# Altium PCB snr-0007.PcbDoc
Units mm, origin at the board's own origin, x right, y up, seen from the top; angles counter-clockwise.
Board outline 150 x 51.5 mm, 2 copper layers (Top Layer, Bottom Layer), stack 1.571 mm thick; 10 components, 0 nets, 10 pads, 0 vias.
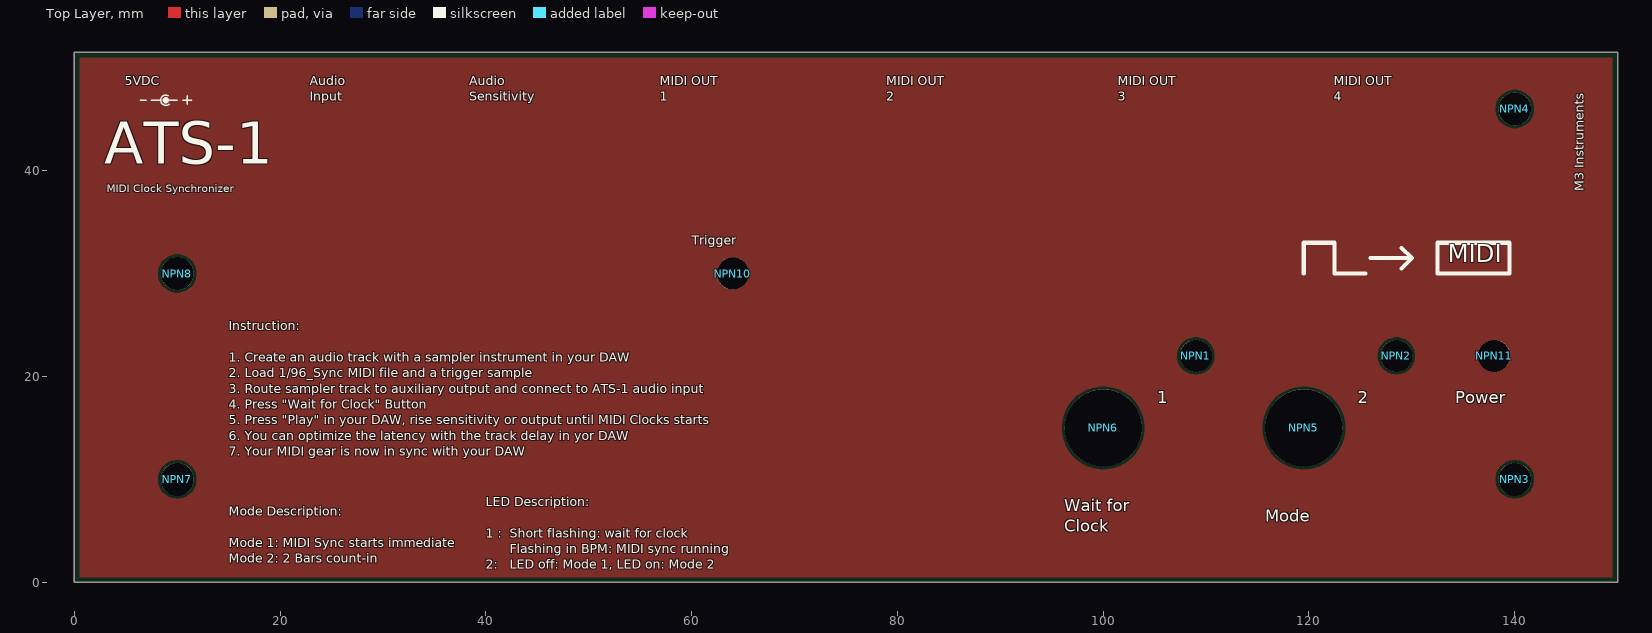
[diagram p0: Top Layer view]
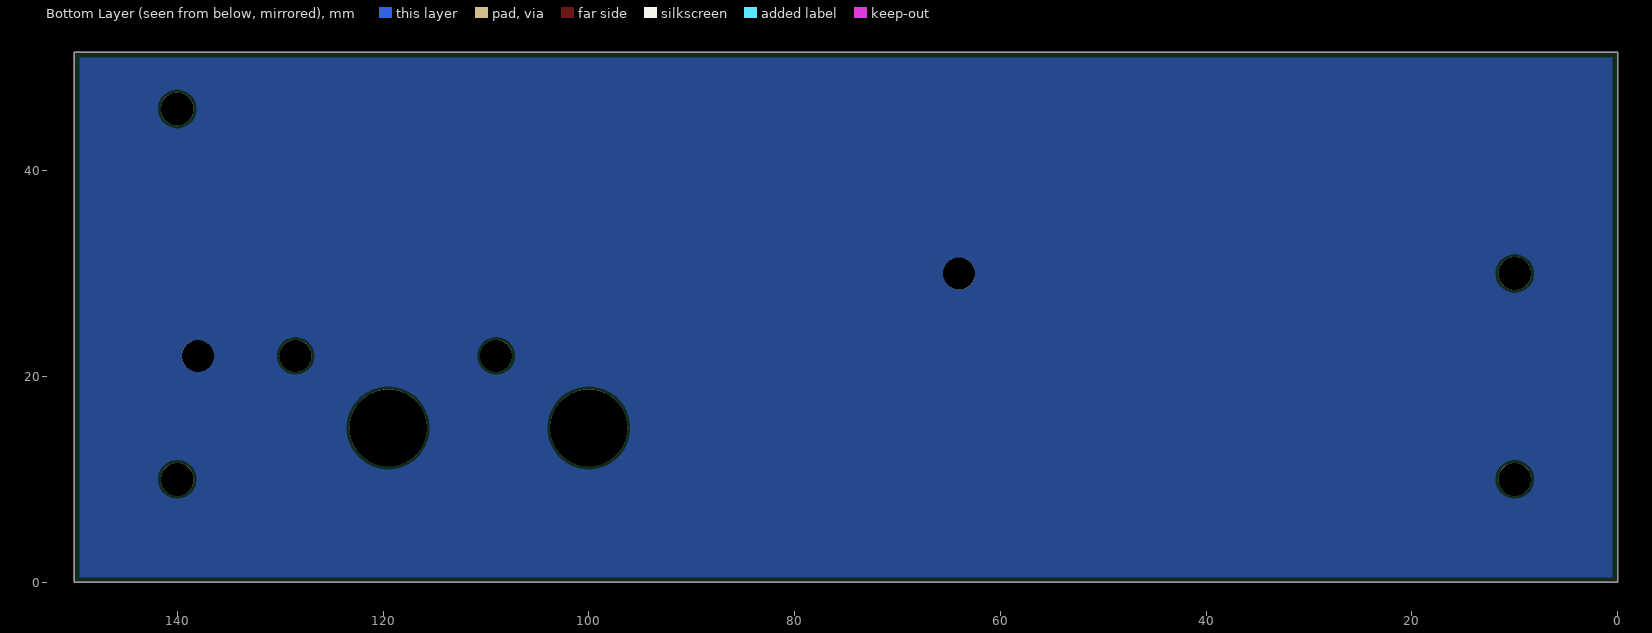
[diagram p1: Bottom Layer view, seen from below]

## Layer stack, top to bottom
Top Solder: solder mask 0.0102, Solder Resist, Dk 3.5
Top Layer: signal copper 0.0356
Dielectric 1: dielectric 1.5, FR-4, Dk 4.8
Bottom Layer: signal copper 0.0356
Bottom Solder: solder mask 0.0102, Solder Resist, Dk 3.5

## Board outline
0,0 150,0 150,51.5 0,51.5

## Design rules (kind name [scope] priority, off if disabled: settings)
Clearance [All] p1: gap=0.254 ignorepadtopadclearanceinfootprint=FALSE except(0: Arc-Hole Track-Hole SMDPad-Hole THPad-Hole Via-Hole Fill-Hole Poly-Hole Region-Hole Text-Hole)
PolygonConnect [All] p1: connectstyle=Relief reliefconductorwidth=0.254 reliefentries=4 polygonreliefangle="90 Angle" airgapwidth=0.254
RoutingVias [All] p1: holewidth=0.711 width=1.27 viastyle="Through Hole" minholewidth=0.711 minwidth=1.27 maxholewidth=0.711 maxwidth=1.27
SolderMaskExpansion [All] p1: expansion=0.102 istentingtop=FALSE
Width [All] p1: maxlimit=0.254 minlimit=0.254 preferedwidth=0.254
30 further rules are at their usual default settings.

## Components (designator, comment, footprint, x,y, rotation, side; value= is the part's Value field where it differs from the comment)
NPN1 "NPN_3.1mm" HOLE_NPH_3.1_LED_3mm#1 109,22 r90 top
NPN2 "NPN_3.1mm" HOLE_NPH_3.1_LED_3mm#1 128.5,22 r90 top
NPN3 "NPN_3.2mm" HOLE_NPH_3.2_M3#1 134.5,7 r90 top
NPN4 "NPN_3.2mm" HOLE_NPH_3.2_M3#2 134.5,41.5 r90 top
NPN5 "NPN_7.5mm" HOLE_NPH_7.5_F01 119.5,15 r0 top
NPN6 "NPN_7.5mm" HOLE_NPH_7.5_F01 100,15 r0 top
NPN7 "NPN_3.2mm" HOLE_NPH_3.2_M3#3 7.5,7 r90 top
NPN8 "NPN_3.2mm" HOLE_NPH_3.2_M3#4 7.5,41.5 r90 top
NPN10 "NPN_3.1mm" HOLE_NPH_3.1_LED_3mm#2 160.5,4 r90 top
NPN11 "NPN_3.1mm" HOLE_NPH_3.1_LED_3mm#3 153,4 r90 top

## Footprints (in the part's own frame and the unit in brackets; to place one, negate y for a bottom-side part, rotate by r counter-clockwise, add the part's x,y. Pads: shape width x height; smd on the part's side, far side on the other; paste and mask are expansions set on the pad)
HOLE_NPH_3.1_LED_3mm#1 [mm]
  round 3.1 hole 3.1 unplated: 8(0,0)
HOLE_NPH_3.1_LED_3mm#2 [mm]
  round 3.1 hole 3.1 unplated: 8(26,96.5)
HOLE_NPH_3.1_LED_3mm#3 [mm]
  round 3.1 hole 3.1 unplated: 8(18,15)
HOLE_NPH_3.2_M3#1 [mm]
  round 3.2 hole 3.2 unplated: 8(3,-5.5)
HOLE_NPH_3.2_M3#2 [mm]
  round 3.2 hole 3.2 unplated: 8(4.5,-5.5)
HOLE_NPH_3.2_M3#3 [mm]
  round 3.2 hole 3.2 unplated: 8(3,-2.5)
HOLE_NPH_3.2_M3#4 [mm]
  round 3.2 hole 3.2 unplated: 8(-11.5,-2.5)
HOLE_NPH_7.5_F01 [mm]
  round 7.5 hole 7.5 unplated: 1(0,0)

## Part data
NPN1 NPN2 NPN10 NPN11: library part NPH_3.1mm_LED_3mm
NPN3 NPN4 NPN7 NPN8: library part NPH_3.2mm_M3
NPN5 NPN6: library part NPH_7.5mm_F01

## Nets (pads, with @x,y where several pads share a name; then routed paths per layer and width w, separated by ;. In a path a pad name is that pad's centre, name@x,y a point inside that pad or via, vN(x,y) a via of type N, cw(c..) or ccw(c..) an arc to the next point about the centre after c; other vN are vias at no path point)
pads on no net: NPN1.8 NPN2.8 NPN3.8 NPN4.8 NPN5.1 NPN6.1 NPN7.8 NPN8.8 NPN10.8 NPN11.8

## Polygon pours and split planes (outlines as drawn)
no net on Bottom Layer "NONET_L02_P001" (solid, pour order 1): 0.5,51 149.5,51 149.5,0.5 0.5,0.5
no net on Top Layer "NONET_L01_P000" (solid, pour order 0): 0.5,51 149.5,51 149.5,0.5 0.5,0.5

## Keep-outs
Keep-Out Layer:
  lines w0.05: 0,51.5 0,0 150,0 ; 0,51.5 0,51.5 ; 0,51.5 150,51.5 ; 150,0 150,51.5 ; 150,0 150,0 ; 150,51.5 150,51.5

## Silkscreen, mask and mechanical layers (free items; w line width, h text height)
Top Overlay:
  circle w0.4: c8.888,46.848 r0.1
  lines w0.15: 6.388,46.848 6.991,46.848 ; 7.491,46.848 8.388,46.848 ; 8.888,46.848 9.991,46.848 ; 9.111,47.295 ccw(c8.888,46.848) 9.218,46.473 ; 10.535,46.848 11.391,46.848 ; 10.991,46.448 10.991,47.295
  lines w0.4: 119.498,30 119.498,33 ; 119.725,33 119.499,33 122.498,33 122.498,30 125.498,30 ; 125.998,31.5 129.999,31.5 ; 128.999,30.5 129.999,31.5 ; 128.999,32.5 129.999,31.5 ; 139.498,33 139.498,30 132.5,30 132.5,33 136.75,33 139.5,33
  text "5VDC" at 4.897,48 h1.52
  text "Audio  / Input" at 22.897,46.5 h1.52
  text "Audio  / Sensitivity" at 38.397,46.5 h1.52
  text "MIDI OUT  / 1" at 56.897,46.5 h1.52
  text "MIDI OUT  / 2" at 78.897,46.5 h1.52
  text "MIDI OUT  / 3" at 101.397,46.5 h1.52
  text "MIDI OUT  / 4" at 122.397,46.5 h1.52
  text "ATS-1" at 2.9,39.3 h7
  text "M3 Instruments" at 146.982,38 h1.5 r90
  text "MIDI Clock Synchronizer" at 3.154,37.904 h0.75
  text "Trigger" at 60,32.5 h1.52
  text "MIDI" at 133.5,30.5 h3
  text "1" at 105.234,17 h2
  text "2" at 124.734,17 h2
  text "Power" at 134.234,17 h2
  text "Instruction: /  / 1. Create an audio track with a sampler instrument in your DAW / 2. Load 1/96_Sync MIDI file and a trigger sample / 3. Route sampler track to auxiliary output and connect to ATS-1 audio input / 4. Press \"Wait for Clock\" Button / 5. Press \"Play\" in your DAW, rise sensitivity or output until MIDI Clocks starts / 6. You can optimize the latency with the track delay in yor DAW / 7. Your MIDI gear is now in sync with your DAW" at 15,12 h1.52
  text "Mode" at 115.734,5.5 h2
  text "Wait for  / Clock" at 96.234,4.5 h2
  text "Mode Description: /  / Mode 1: MIDI Sync starts immediate / Mode 2: 2 Bars count-in" at 15,1.578 h1.52
  text "LED Description: /  / 1 :  Short flashing: wait for clock /       Flashing in BPM: MIDI sync running / 2:   LED off: Mode 1, LED on: Mode 2" at 40,1 h1.52
Top Solder:
  circle w0.4: c79.625,13.3 r5.442
  lines w0.05: 117.957,51 145,51 145,50
  lines w0.2: 23.5,37 138,37 ; 23.5,38 137,38 ; 23.5,39 136,39 ; 23.5,40 135,40 ; 23.5,41 134,41 ; 23.5,42 132.424,42 ; 23.5,43 132,43 ; 23.5,44 131,44
  lines w0.4: 132.424,42 133,41.424
  lines w0.8: 1.5,26.632 149,26.632 ; 1.5,35.848 80.522,35.848 71.337,26.663 66.663,26.663 69,29 69,35.557 ; 1.5,41 1.5,45.1 28.1,45.1 ; 17.854,45.1 129.6,45.1 138.7,36 ; 18.663,26.632 27.868,35.837 37.073,26.632 ; 21.887,26.632 29.5,26.632 36.832,26.632 39.357,29.157 ; 23.492,44.9 23.5,36 ; 35.668,35.848 46.152,35.848 55.358,26.642 58.6,26.642 58.6,35.848 48.057,35.848 ; 36.791,26.65 45.996,35.855 ; 66.698,26.652 69,26.652 69,1.512 68.717,1.229 ; 80.207,35.557 89.132,26.632 93.132,26.632 102.057,35.557 ; 80.5,35.848 149,35.848 ; 86.863,1.237 91,1.237 ; 102.622,35.557 111.422,26.757 ; 134.92,1.2 149,1.2 149,50 1.5,50 1.5,1.2 137.2,1.2 ; 136.79,37.91 136.88,37.82
  text "3" at 83.12,15.797 h5 r180
  text "3" at 76.15,10.825 h5
Bottom Solder:
  circle w2: c10,10 r2.55
  circle w2: c10,30 r2.55
  circle w2: c140,10 r2.55
  circle w2: c140,46 r2.55
Mechanical 2:
  lines w0.05: 0,0 150,0 150,51.5 0,51.5 0,0
  lines w0.17: 0,51.5 0,51.5 ; 150,0 150,0 ; 150,51.5 150,51.5